# Altium PCB converter.PcbDoc (part 2 of 2)
Units mm, origin at the board's own origin, x right, y up, seen from the top; angles counter-clockwise.
Board outline 152.4 x 101.6 mm, 2 copper layers (Top Layer, Bottom Layer); 107 components, 95 nets, 363 pads, 0 vias.
Unrouted connection lines stored in the file: 249.
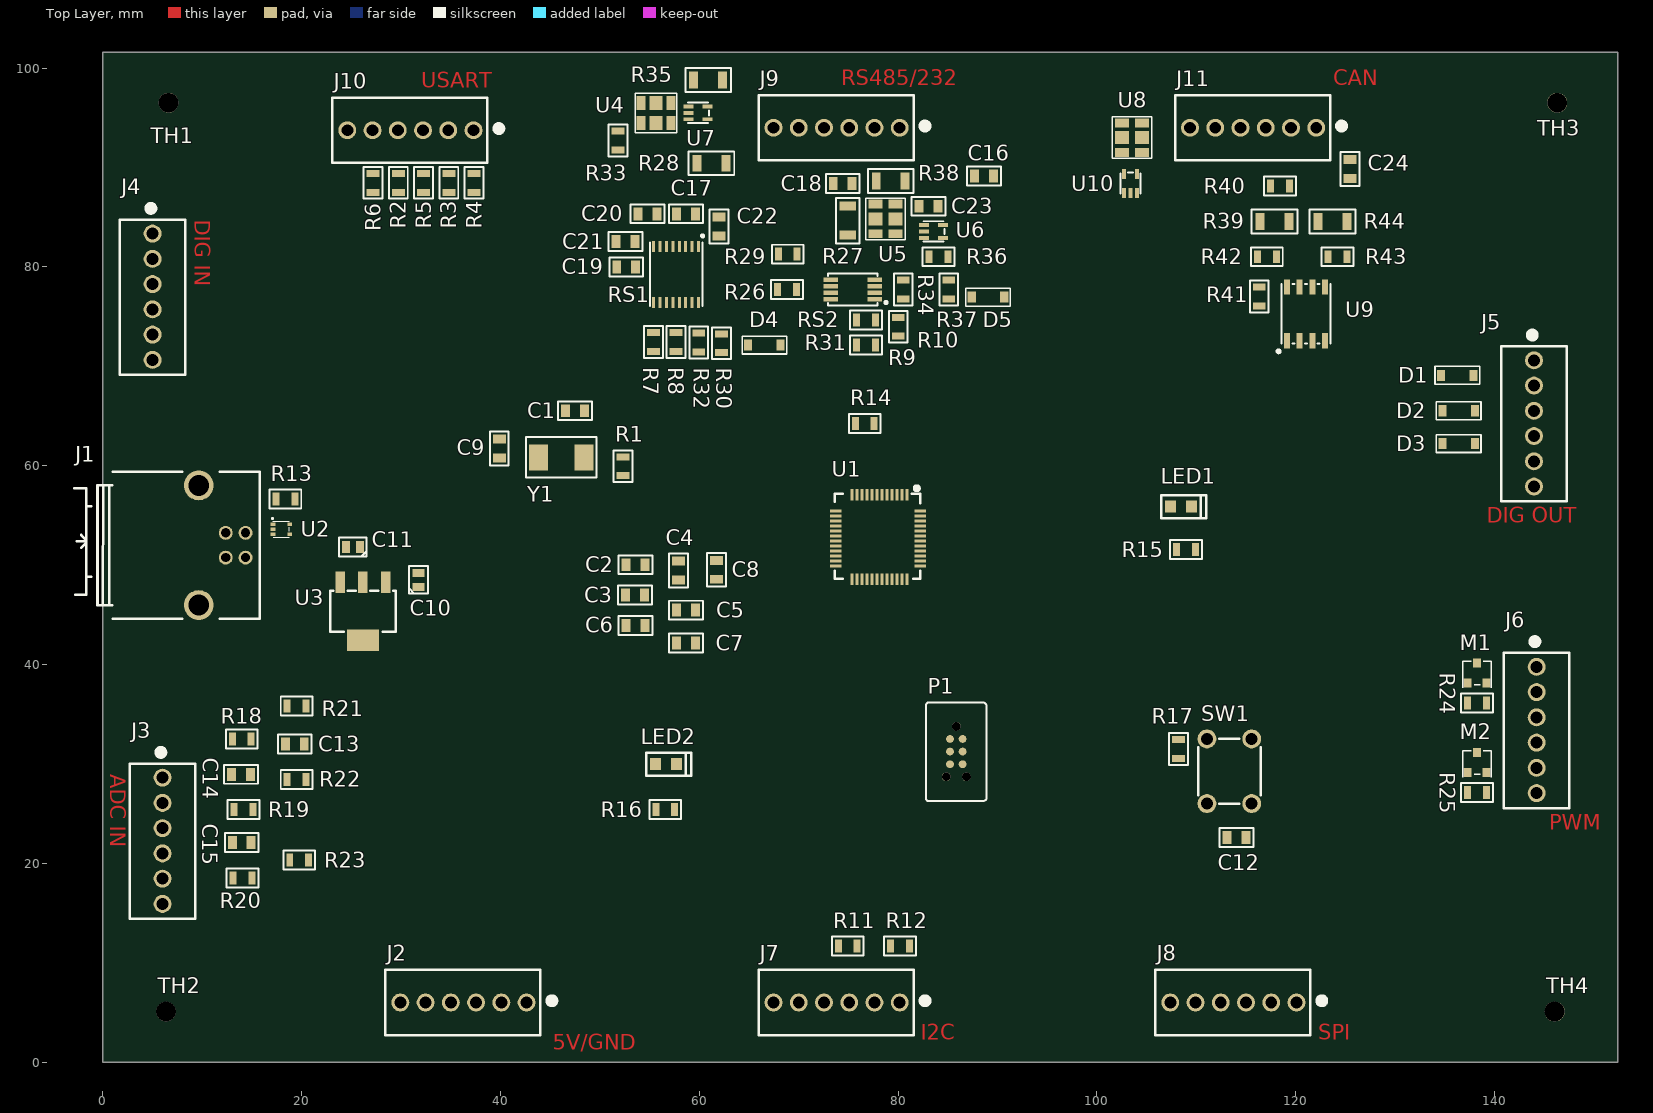
[diagram p0: Top Layer view]

## Part data (continued)
R21 R22 R23: library part RC0805FR-07100KL, "RES - 100K 1/8W 0805 1%", Case Code (Imperial)=0805, Case Code (Metric)=2012, Manufacturer=Yageo, Max Operating Temperature=155°C, Max Power Dissipation=125mW, Min Operating Temperature=-55°C, Package Quantity=1, Resistance=100kR, Resistance Tolerance=1%, Resistor Type="Thick Film", Supplier Part Number 1=311-100KCRCT-ND, Temperature Coefficient=100ppm/°C, Voltage Rating=150V, Case/Package=0805, Category="Chip SMD Resistors", ComponentLink1Description=https://datasheet.ciiva.com/11808/0900766b8106beab-11808858.pdf?src-supplier=RSComponents, ComponentLink1URL=https://datasheet.ciiva.com/11808/0900766b8106beab-11808858.pdf?src-supplier=RSComponents, ComponentLink2Description=https://datasheet.ciiva.com/7941/1686128-7941677.pdf?src-supplier=Element14, ComponentLink2URL=https://datasheet.ciiva.com/7941/1686128-7941677.pdf?src-supplier=Element14, ComponentLink3Description=https://datasheet.ciiva.com/7660/38627-7660796.pdf?src-supplier=Element14, ComponentLink3URL=https://datasheet.ciiva.com/7660/38627-7660796.pdf?src-supplier=Element14, ComponentLink4Description=https://datasheet.ciiva.com/22747/444164-22747534.pdf?src-supplier=Element14, ComponentLink4URL=https://datasheet.ciiva.com/22747/444164-22747534.pdf?src-supplier=Element14, ComponentLink5Description=https://datasheet.ciiva.com/2457/pyu-r-int-thick-7-2457018.pdf?src-supplier=Digi-Key, ComponentLink5URL=https://datasheet.ciiva.com/2457/pyu-r-int-thick-7-2457018.pdf?src-supplier=Digi-Key, ComponentLink6Description=https://datasheet.ciiva.com/2457/pyu-r-int-thick-7-2457019.pdf?src-supplier=Digi-Key, ComponentLink6URL=https://datasheet.ciiva.com/2457/pyu-r-int-thick-7-2457019.pdf?src-supplier=Digi-Key, ComponentLink7Description=https://datasheet.ciiva.com/2457/pyu-r-int-thick-7-2457017.pdf?src-supplier=Digi-Key, ComponentLink7URL=https://datasheet.ciiva.com/2457/pyu-r-int-thick-7-2457017.pdf?src-supplier=Digi-Key, ComponentLink8Description=https://datasheet.ciiva.com/12667/rc0805-12667001.pdf?src-supplier=Mouser, ComponentLink8URL=https://datasheet.ciiva.com/12667/rc0805-12667001.pdf?src-supplier=Mouser, ComponentLink9Description=https://datasheet.ciiva.com/7941/1697719-7941676.pdf?src-supplier=Element14, ComponentLink9URL=https://datasheet.ciiva.com/7941/1697719-7941676.pdf?src-supplier=Element14, ComponentLink10Description=https://datasheet.ciiva.com/7941/1697719-7941678.pdf?src-supplier=Element14, ComponentLink10URL=https://datasheet.ciiva.com/7941/1697719-7941678.pdf?src-supplier=Element14, ComponentLink11Description=https://datasheet.ciiva.com/16747/rc0805-16747226.pdf?src-supplier=Future+Electronics, ComponentLink11URL=https://datasheet.ciiva.com/16747/rc0805-16747226.pdf?src-supplier=Future+Electronics, Construction=Rectangular, Depth=1.25mm, Features="Moisture Resistant", Height=0.024inch, Lead Free="Lead Free", Lead Pitch=0.4mm, Length=2mm, Manufacturer Part Number=RC0805FR-07100KL, Military Standard=Not, Number of Pins=2, Number of Terminations=2, Packaging="Tape and Reel", Power Rating=125mW, Pricing 1="1=0,10000, 10=0,04200, 100=0,01690, 1000=0,00759, 2500=0,00659 (USD)", REACH SVHC=Unknown, RoHS=Yes, RoHS Compliant=Yes, Series=RC, Size Code=0805, Stock 1=650822, Supplier 1=Digi-Key, Technology="THICK FILM", Termination=SMD/SMT, Tolerance=1%, Voltage Rating (DC)=150V, Width=0.049inch
R27 R28 R35 R38 R39 R44: library part RC1206JR-070RL, "RES - 0R 1/4W 1206 5%", Case Code (Imperial)=1206, Case Code (Metric)=3216, Manufacturer=Yageo, Max Operating Temperature=155°C, Max Power Dissipation=250mW, Min Operating Temperature=-55°C, Package Quantity=5000, Resistance=0mR, Resistance Tolerance=5%, Resistor Type="Thick Film,Carbon Film", Supplier Part Number 1=311-0.0ERCT-ND, Temperature Coefficient=200ppm/°C, Voltage Rating=200V, Case/Package=1206, Category="Chip SMD Resistors", ComponentLink1Description=https://datasheet.ciiva.com/11808/0900766b80c6630a-11808156.pdf?src-supplier=RSComponents, ComponentLink1URL=https://datasheet.ciiva.com/11808/0900766b80c6630a-11808156.pdf?src-supplier=RSComponents, ComponentLink2Description=https://datasheet.ciiva.com/29181/402222-da-01-en-smd-widerstand-0-ohm-1206-29181568.pdf?src-supplier=Conrad, ComponentLink2URL=https://datasheet.ciiva.com/29181/402222-da-01-en-smd-widerstand-0-ohm-1206-29181568.pdf?src-supplier=Conrad, ComponentLink3Description=https://datasheet.ciiva.com/2458/pyu-rc1206-51-rohs-l-4-2458668.pdf?src-supplier=Digi-Key, ComponentLink3URL=https://datasheet.ciiva.com/2458/pyu-rc1206-51-rohs-l-4-2458668.pdf?src-supplier=Digi-Key, ComponentLink4Description=https://datasheet.ciiva.com/2458/pyu-rc1206-51-rohs-l-4-2458669.pdf?src-supplier=Digi-Key, ComponentLink4URL=https://datasheet.ciiva.com/2458/pyu-rc1206-51-rohs-l-4-2458669.pdf?src-supplier=Digi-Key, ComponentLink5Description=https://datasheet.ciiva.com/2458/pyu-rc1206-51-rohs-l-4-2458670.pdf?src-supplier=Digi-Key, ComponentLink5URL=https://datasheet.ciiva.com/2458/pyu-rc1206-51-rohs-l-4-2458670.pdf?src-supplier=Digi-Key, ComponentLink6Description=https://datasheet.ciiva.com/7857/1692832-7857421.pdf?src-supplier=Element14, ComponentLink6URL=https://datasheet.ciiva.com/7857/1692832-7857421.pdf?src-supplier=Element14, ComponentLink7Description=https://datasheet.ciiva.com/17035/pyu-rc1206-51-rohs-l-4-17035512.pdf?src-supplier=Future+Electronics, ComponentLink7URL=https://datasheet.ciiva.com/17035/pyu-rc1206-51-rohs-l-4-17035512.pdf?src-supplier=Future+Electronics, ComponentLink8Description=https://datasheet.ciiva.com/46445/444357-46445719.pdf?src-supplier=Element14, ComponentLink8URL=https://datasheet.ciiva.com/46445/444357-46445719.pdf?src-supplier=Element14, ComponentLink9Description=https://datasheet.ciiva.com/7857/1692832-7857422.pdf?src-supplier=Element14, ComponentLink9URL=https://datasheet.ciiva.com/7857/1692832-7857422.pdf?src-supplier=Element14, ComponentLink10Description=https://datasheet.ciiva.com/7983/444357-7983807.pdf?src-supplier=Element14, ComponentLink10URL=https://datasheet.ciiva.com/7983/444357-7983807.pdf?src-supplier=Element14, ComponentLink11Description=https://datasheet.ciiva.com/22747/1692832-22747541.pdf?src-supplier=Element14, ComponentLink11URL=https://datasheet.ciiva.com/22747/1692832-22747541.pdf?src-supplier=Element14, Construction=Rectangular, Contact Plating=Tin,Matte, Depth=1.6mm, Height=0.026inch, Lead Free="Lead Free", Length=3.1mm, Manufacturer Part Number=RC1206JR-070RL, Military Standard=Not, Number of Terminations=2, Packaging="Tape and Reel", Power Rating=250mW, Pricing 1="1=0.10000, 10=0.05500, 25=0.04000, 50=0.03040, 100=0.02240, 250=0.01712, 500=0.01368, 1000=0.01007 (USD)", Radiation Hardening=No, REACH SVHC=Unknown, RoHS=Yes, RoHS Compliant=Yes, Series=RC1206, Size Code=1206, Stock 1=6773822, Supplier 1=Digi-Key, Technology="THICK FILM", Termination=SMD/SMT, Tolerance=5%, Width=0.063inch
R29 R32 R33 R36: library part RMCF0805JT330R, "RES - 330R 1/8W 0805 5%", Case Code (Imperial)=0805, Case Code (Metric)=2012, Manufacturer="Stackpole Electronics", Max Operating Temperature=155°C, Max Power Dissipation=125mW, Min Operating Temperature=-55°C, Resistor Type="Thick Film", Supplier Part Number 1=RMCF0805JT330RCT-ND, Temperature Coefficient=200ppm/°C, Tolerance=5%, Case/Package=0805, Category="Chip SMD Resistors", ComponentLink1Description=http://components.arrow.com/part/dataview/44988371S7054774N1174?src-supplier=Arrow+Electronics, ComponentLink1URL=http://components.arrow.com/part/dataview/44988371S7054774N1174?src-supplier=Arrow+Electronics, ComponentLink2Description=https://www.seielect.com/catalog/SEI-Packaging.pdf?src-supplier=Digi-Key, ComponentLink2URL=https://www.seielect.com/catalog/SEI-Packaging.pdf?src-supplier=Digi-Key, ComponentLink3Description=https://www.seielect.com/Catalog/SEI-RMCF_RMCP.pdf?src-supplier=Avnet, ComponentLink3URL=https://www.seielect.com/Catalog/SEI-RMCF_RMCP.pdf?src-supplier=Avnet, ComponentLink4Description=https://www.verical.com/server-webapp/html/getDatasheet?partID=360139&src-supplier=Verical, ComponentLink4URL=https://www.verical.com/server-webapp/html/getDatasheet?partID=360139&src-supplier=Verical, ComponentLink5Description=http://www.seielect.com/Catalog/SEI-RMC.pdf?src-supplier=Future+Electronics, ComponentLink5URL=http://www.seielect.com/Catalog/SEI-RMC.pdf?src-supplier=Future+Electronics, Construction=Rectangular, Contact Plating=Tin,Matte, Depth=1.25mm, Features="Automotive AEC-Q200", Height=0.026inch, Lead Free="Lead Free", Length=2mm, Manufacturer Part Number=RMCF0805JT330R, Military Standard=Not, Mount="Surface Mount", Number of Terminations=2, Packaging="Tape and Reel", Power Rating=125mW, Pricing 1="1=0,10000, 10=0,02000, 100=0,00810, 1000=0,00366, 2500=0,00318 (USD)", Radiation Hardening=No, Resistance=330R, RoHS=Yes, RoHS Compliant=Yes, Series=RMCF, Size Code=0805, Stock 1=260111, Supplier 1=Digi-Key, Width=0.049inch
R42 R43: library part AC0805FR-0733RL, "RES - 33R 1/8W 0805 1%", Case Code (Imperial)=0805, Case Code (Metric)=2012, Manufacturer=Yageo, Max Operating Temperature=155°C, Max Power Dissipation=125mW, Min Operating Temperature=-55°C, Resistor Type="Thick Film", Supplier Part Number 1=YAG5367CT-ND, Temperature Coefficient=100ppm/°C, Tolerance=1%, Voltage Rating=150V, Case/Package=0805, Category="Chip SMD Resistors", ComponentLink1Description=http://www.mouser.com/ds/2/447/yageodocoutput-1111992.pdf?src-supplier=Mouser, ComponentLink1URL=http://www.mouser.com/ds/2/447/yageodocoutput-1111992.pdf?src-supplier=Mouser, ComponentLink2Description=http://www.yageo.com/NewPortal/yageodocoutput?fileName=/pdf/R-Chip/PYu-AC_51_RoHS_L_6.pdf&src-supplier=Digi-Key, ComponentLink2URL=http://www.yageo.com/NewPortal/yageodocoutput?fileName=/pdf/R-Chip/PYu-AC_51_RoHS_L_6.pdf&src-supplier=Digi-Key, ComponentLink3Description=http://www.yageo.com/NewPortal/yageodocoutput?fileName=/pdf/R-Chip/PYu-AC_51_RoHS_L_5.pdf&src-supplier=Digi-Key, ComponentLink3URL=http://www.yageo.com/NewPortal/yageodocoutput?fileName=/pdf/R-Chip/PYu-AC_51_RoHS_L_5.pdf&src-supplier=Digi-Key, Features="Moisture Resistant,Automotive AEC-Q200", Height=0.024inch, Length=0.079inch, Manufacturer Part Number=AC0805FR-0733RL, Number of Terminations=2, Packaging="Tape and Reel", Power Rating=125mW, Pricing 1="1=0.10000, 10=0.05000, 100=0.02040, 1000=0.00917, 2500=0.00796 (USD)", Resistance=33R, RoHS=Yes, RoHS Compliant=Yes, Series=AC, Stock 1=4670, Supplier 1=Digi-Key, Termination=SMD/SMT, Width=0.049inch
RS1: "RS-232 TRANSCEIVER 16-Pin TSSOP", Manufacturer=Renesas, Supplier Part Number 1=ICL3221EIVZ-TCT-ND, Category="RS-232 / RS-422 / RS-485 Interface ICs", ComponentLink1Description=https://4donline.ihs.com/images/VipMasterIC/IC/RNCC/RNCC-S-A0008369024/RNCC-S-A0008369024-1.pdf?hkey=6D3A4C79FDBF58556ACFDE234799DDF0&src-supplier=Farnell, ComponentLink1URL=https://4donline.ihs.com/images/VipMasterIC/IC/RNCC/RNCC-S-A0008369024/RNCC-S-A0008369024-1.pdf?hkey=6D3A4C79FDBF58556ACFDE234799DDF0&src-supplier=Farnell, ComponentLink2Description=https://4donline.ihs.com/images/VipMasterIC/IC/RNCC/RNCC-S-A0008369024/RNCC-S-A0008369024-1.pdf?hkey=6D3A4C79FDBF58556ACFDE234799DDF0&src-supplier=Newark, ComponentLink2URL=https://4donline.ihs.com/images/VipMasterIC/IC/RNCC/RNCC-S-A0008369024/RNCC-S-A0008369024-1.pdf?hkey=6D3A4C79FDBF58556ACFDE234799DDF0&src-supplier=Newark, Manufacturer Part Number=ICL3221EIVZ-T, Pricing 1="1=1,56000, 10=1,40400, 25=1,32480, 100=1,12890, 250=1,06000, 500=0,92750, 1000=0,83500 (USD)", RoHS=Yes, RoHS Compliant=Yes, Stock 1=4298, Supplier 1=Digi-Key
RS2: "RS-485 TRANSCEIVER HVD7X", Case/Package=VSSOP, Manufacturer="Texas Instruments", Max Operating Temperature=125°C, Max Supply Voltage=3.6V, Min Operating Temperature=-40°C, Min Supply Voltage=3V, Nominal Supply Current=950uA, Operating Supply Voltage=3.3V, Output Current=8mA, Output Voltage=2V, Package Quantity=2500, Supplier Part Number 1=296-SN65HVD72DGKRCT-ND, Category="Interface ICs", ComponentLink1Description=https://datasheet.ciiva.com/28650/1787953-28650706.pdf?src-supplier=Element14, ComponentLink1URL=https://datasheet.ciiva.com/28650/1787953-28650706.pdf?src-supplier=Element14, ComponentLink2Description=https://datasheet.ciiva.com/26946/getdatasheetpartid-716725-26946073.pdf?src-supplier=Verical, ComponentLink2URL=https://datasheet.ciiva.com/26946/getdatasheetpartid-716725-26946073.pdf?src-supplier=Verical, ComponentLink3Description=https://datasheet.ciiva.com/41461/001187608-da-01-en-ic-txrx-rs485-sn65hvd72dgkr-vssop-8-tid-41461063.pdf?src-supplier=Conrad, ComponentLink3URL=https://datasheet.ciiva.com/41461/001187608-da-01-en-ic-txrx-rs485-sn65hvd72dgkr-vssop-8-tid-41461063.pdf?src-supplier=Conrad, ComponentLink4Description=https://datasheet.ciiva.com/6636/sn65hvd72-6636345.pdf?src-supplier=Digi-Key, ComponentLink4URL=https://datasheet.ciiva.com/6636/sn65hvd72-6636345.pdf?src-supplier=Digi-Key, ComponentLink5Description=https://datasheet.ciiva.com/6636/sn65hvd72-6636346.pdf?src-supplier=Digi-Key, ComponentLink5URL=https://datasheet.ciiva.com/6636/sn65hvd72-6636346.pdf?src-supplier=Digi-Key, ComponentLink6Description=https://datasheet.ciiva.com/6636/sn65hvd72-6636347.pdf?src-supplier=Digi-Key, ComponentLink6URL=https://datasheet.ciiva.com/6636/sn65hvd72-6636347.pdf?src-supplier=Digi-Key, ComponentLink7Description=https://datasheet.ciiva.com/14195/sn65hvd75-14195211.pdf?src-supplier=Avnet, ComponentLink7URL=https://datasheet.ciiva.com/14195/sn65hvd75-14195211.pdf?src-supplier=Avnet, ComponentLink8Description=https://datasheet.ciiva.com/24096/sn65hvd72-446416-24096821.pdf?src-supplier=Mouser, ComponentLink8URL=https://datasheet.ciiva.com/24096/sn65hvd72-446416-24096821.pdf?src-supplier=Mouser, Data Rate=0.25Mbps, Interface=RS-485, Lead Free="Lead Free", Logic Function=Transceiver, Manufacturer Part Number=SN65HVD72DGKR, Number of Drivers=1, Number of Pins=8, Number of Receivers=1, Number of Transceivers=1, Number of Transmitters=1, Packaging="Tape and Reel", Pricing 1="1=4,03000 (USD)", Propagation Delay=0.7us, Radiation Hardening=No, REACH SVHC="No SVHC", RoHS=Yes, Series=-, Simplex/Duplex="Half Duplex", Supplier 1=Digi-Key, Supply Current=950uA
SW1: "SWITCH TACTILE 0.05A 12V", Case/Package=SMD/SMT, Color=Black, Current Rating=50mA, Manufacturer="ITT C&K", Max Operating Temperature=60°C, Max Voltage Rating (DC)=12V, Min Operating Temperature=-20°C, Operating Force=200gf, Package Quantity=1000, Supplier Part Number 1=CKN9085CT-ND, Actuator Material=Nylon,Polyamide,PA66, Actuator Type=Standard, Category="Tactile Switches", ComponentLink1Description=https://datasheet.ciiva.com/29903/getdatasheetpartid-773702-29903807.pdf?src-supplier=Verical, ComponentLink1URL=https://datasheet.ciiva.com/29903/getdatasheetpartid-773702-29903807.pdf?src-supplier=Verical, ComponentLink2Description=https://datasheet.ciiva.com/14920/pts645-14920741.pdf?src-supplier=Digi-Key, ComponentLink2URL=https://datasheet.ciiva.com/14920/pts645-14920741.pdf?src-supplier=Digi-Key, ComponentLink3Description=https://datasheet.ciiva.com/22637/1707731-22637356.pdf?src-supplier=Element14, ComponentLink3URL=https://datasheet.ciiva.com/22637/1707731-22637356.pdf?src-supplier=Element14, Contact Material=Bronze, Contact Plating=Silver, Depth=9mm, Illumination Type=Non-Illuminated,Illuminated, Lead Free="Lead Free", Length=6mm, Manufacturer Part Number=PTS645SH50SMTR92LFS, Max Current Rating=50mA, Mechanical Life=100000Cycles, Mount="Surface Mount", Orientation=Straight, Packaging="Tape and Reel", Pricing 1="1=0,25000, 10=0,24200, 25=0,22960, 100=0,20780, 250=0,18944, 500=0,17610 (USD)", REACH SVHC="No SVHC", RoHS=Yes, Series=PTS645, Stock 1=211938, Supplier 1=Digi-Key, Switch Function=Off-Mom, Termination="Gull Wing", Throw Configuration=SPST, Voltage Rating (DC)=12V
TH1 TH2 TH3 TH4: "MECH - Tooling Holes"
U1: "MCU 32-bit 128KB 2.5V/3.3V 48-Pin LQFP", Case/Package=LQFP, Frequency=72MHz, Manufacturer=STMicroelectronics, Max Operating Temperature=85°C, Max Power Dissipation=363mW, Max Supply Voltage=3.6V, Min Operating Temperature=-40°C, Min Supply Voltage=2V, Package Quantity=250, Supplier Part Number 1=497-6288-ND, Address Bus Width=32b, Category=Microcontrollers, ComponentLink1Description=https://datasheet.ciiva.com/15122/getdatasheetpartid-92132-15122195.pdf?src-supplier=Verical, ComponentLink1URL=https://datasheet.ciiva.com/15122/getdatasheetpartid-92132-15122195.pdf?src-supplier=Verical, ComponentLink2Description=https://datasheet.ciiva.com/23669/1714663-23669200.pdf?src-supplier=Newark, ComponentLink2URL=https://datasheet.ciiva.com/23669/1714663-23669200.pdf?src-supplier=Newark, ComponentLink3Description=https://datasheet.ciiva.com/26820/stm32f103cbt6-26820680.pdf?src-supplier=IIIC, ComponentLink3URL=https://datasheet.ciiva.com/26820/stm32f103cbt6-26820680.pdf?src-supplier=IIIC, ComponentLink4Description=https://datasheet.ciiva.com/5752/cd00161566-5752838.pdf?src-supplier=Farnell, ComponentLink4URL=https://datasheet.ciiva.com/5752/cd00161566-5752838.pdf?src-supplier=Farnell, ComponentLink5Description=https://datasheet.ciiva.com/1502/cd00161566-1502328.pdf?src-supplier=Digi-Key, ComponentLink5URL=https://datasheet.ciiva.com/1502/cd00161566-1502328.pdf?src-supplier=Digi-Key, ComponentLink6Description=https://datasheet.ciiva.com/4840/cd00161566-4840398.pdf?src-supplier=Mouser, ComponentLink6URL=https://datasheet.ciiva.com/4840/cd00161566-4840398.pdf?src-supplier=Mouser, ComponentLink7Description=https://datasheet.ciiva.com/16540/cd00161566-16540806.pdf?src-supplier=Avnet+Asia, ComponentLink7URL=https://datasheet.ciiva.com/16540/cd00161566-16540806.pdf?src-supplier=Avnet+Asia, ComponentLink8Description=https://datasheet.ciiva.com/16219/cd00161566-16219150.pdf?src-supplier=Future+Electronics, ComponentLink8URL=https://datasheet.ciiva.com/16219/cd00161566-16219150.pdf?src-supplier=Future+Electronics, ComponentLink9Description=https://datasheet.ciiva.com/14100/pustm-arm-microcont-stm32f103-en-14100509.pdf?src-supplier=Distrelec, ComponentLink9URL=https://datasheet.ciiva.com/14100/pustm-arm-microcont-stm32f103-en-14100509.pdf?src-supplier=Distrelec, Contact Plating=Gold, Core Architecture=ARM, Data Bus Width=32b, Density=128KB, Height=1.45mm, Interface=I2C,SPI,USB,CAN,IrDA,UART,USART,LIN, Lead Free="Lead Free", Length=7mm, Manufacturer Part Number=STM32F103CBT6, Max Frequency=72MHz, Memory Size=128KB, Memory Type=FLASH, Number of ADC Channels=10, Number of Bits=32, Number of I2C Channels=2, Number of I/Os=37, Number of Pins=48, Number of Programmable I/O=37, Number of PWM Channels=12, Number of SPI Channels=2, Number of Timers/Counters=4, Oscillator Type=Internal, Packaging=Tray, Peripherals="POR,PWM,WDT,DMA,Temp Sensor,I2C", Pricing 1="1=6.82000, 10=6.12800, 25=5.79320, 80=5.02100, 250=4.76344, 500=4.27424, 1000=3.75498 (USD)", Radiation Hardening=No, RAM Size=20KB, REACH SVHC="No SVHC", RoHS=Yes, RoHS Compliant=Yes, Series="STM32 F1", Supplier 1=Digi-Key, Termination=SMD/SMT, Watchdog Timer=Yes, Width=7.2mm
U2: "ESD TVS VRWM - 5V / VBR - 6-8V /", Breakdown Voltage=7V, Capacitance=20pF, Case/Package=SOT-553, Clamping Voltage=14V, Leakage Current=100nA, Manufacturer=Diodes, Max Operating Temperature=150°C, Max Power Dissipation=380mW, Max Surge Current=6A, Min Breakdown Voltage=6V, Min Operating Temperature=-65°C, Package Quantity=3000, Peak Pulse Power=84W, Power Line Protection=No, Resistor Type=Zener, Reverse Standoff Voltage=5V, Supplier Part Number 1=D5V0L4B5V-7DICT-ND, Test Current=1mA, Category="TVS Diodes", ComponentLink1Description=https://datasheet.ciiva.com/12326/d5v0l4b5v-218334-12326570.pdf?src-supplier=Mouser, ComponentLink1URL=https://datasheet.ciiva.com/12326/d5v0l4b5v-218334-12326570.pdf?src-supplier=Mouser, ComponentLink2Description=https://datasheet.ciiva.com/334/d5v0l4b5v-334001.pdf?src-supplier=Digi-Key, ComponentLink2URL=https://datasheet.ciiva.com/334/d5v0l4b5v-334001.pdf?src-supplier=Digi-Key, ComponentLink3Description=https://datasheet.ciiva.com/25624/0900766b8115c347-25624818.pdf?src-supplier=RSComponents, ComponentLink3URL=https://datasheet.ciiva.com/25624/0900766b8115c347-25624818.pdf?src-supplier=RSComponents, ComponentLink4Description=https://datasheet.ciiva.com/11193/d5v0l4b5v-11193845.pdf?src-supplier=Avnet, ComponentLink4URL=https://datasheet.ciiva.com/11193/d5v0l4b5v-11193845.pdf?src-supplier=Avnet, Contact Plating=Tin,Matte, Depth=1.2mm, Diode Type=ZENER, Direction=Bidirectional, ESD Protection=Yes, Height=0.6mm, Lead Free="Lead Free", Length=1.6mm, Manufacturer Part Number=D5V0L4B5V-7, Max Reverse Leakage Current=100nA, Mount="Surface Mount", Number of Bidirectional Channels=4, Number of Channels=4, Number of Pins=5, Packaging="Tape and Reel", Peak Pulse Current=6A, Polarity=Bidirectional, Pricing 1="1=0,51000, 10=0,38600, 100=0,24040, 500=0,16444, 1000=0,12650 (USD)", Radiation Hardening=No, REACH SVHC="No SVHC", RoHS=Yes, RoHS Compliant=Yes, Series=-, Stock 1=22216, Supplier 1=Digi-Key, Termination=SMD/SMT, Width=1.25mm, Working Voltage=5V
U3: "IC REG LDO 3.3V 800mA SOT223", Case/Package=SOT-223, Current Rating=800A, Dropout Voltage=1.2V, Manufacturer="Texas Instruments", Max Input Voltage=15V, Max Operating Temperature=125°C, Max Output Current=800mA, Max Supply Voltage=10V, Min Input Voltage=2.6V, Min Operating Temperature=-40°C, Min Supply Voltage=4.75V, Nominal Output Voltage=3.3V, Output Voltage Accuracy=1%, Package Quantity=1000, Quiescent Current=15mA, Supplier Part Number 1=926-LM1117IMP3.3NOPB, Accuracy=1%, Category="Voltage Regulators - Linear", ComponentLink1Description=https://datasheet.ciiva.com/27051/1281318-27051810.pdf?src-supplier=Jameco, ComponentLink1URL=https://datasheet.ciiva.com/27051/1281318-27051810.pdf?src-supplier=Jameco, ComponentLink2Description=https://datasheet.ciiva.com/8042/1670636-8042261.pdf?src-supplier=Element14, ComponentLink2URL=https://datasheet.ciiva.com/8042/1670636-8042261.pdf?src-supplier=Element14, ComponentLink3Description=https://datasheet.ciiva.com/1570/1849796-1570171.pdf?src-supplier=Farnell, ComponentLink3URL=https://datasheet.ciiva.com/1570/1849796-1570171.pdf?src-supplier=Farnell, ComponentLink4Description=https://datasheet.ciiva.com/14149/lm1117-eng-tds-14149980.pdf?src-supplier=Distrelec, ComponentLink4URL=https://datasheet.ciiva.com/14149/lm1117-eng-tds-14149980.pdf?src-supplier=Distrelec, ComponentLink5Description=https://datasheet.ciiva.com/46386/1882372-46386042.pdf?src-supplier=Element14, ComponentLink5URL=https://datasheet.ciiva.com/46386/1882372-46386042.pdf?src-supplier=Element14, ComponentLink6Description=https://datasheet.ciiva.com/3223/lm1117-n-3223515.pdf?src-supplier=Avnet, ComponentLink6URL=https://datasheet.ciiva.com/3223/lm1117-n-3223515.pdf?src-supplier=Avnet, ComponentLink7Description=https://datasheet.ciiva.com/6580/lm1117-n-6580030.pdf?src-supplier=Digi-Key, ComponentLink7URL=https://datasheet.ciiva.com/6580/lm1117-n-6580030.pdf?src-supplier=Digi-Key, ComponentLink8Description=https://datasheet.ciiva.com/6580/lm1117-n-6580026.pdf?src-supplier=Digi-Key, ComponentLink8URL=https://datasheet.ciiva.com/6580/lm1117-n-6580026.pdf?src-supplier=Digi-Key, Height=1.6mm, Lead Free="Lead Free", Length=6.5mm, Manufacturer Part Number=LM1117IMP-3.3/NOPB, Min Current Limit=800mA, Mount="Surface Mount", Number of Outputs=1, Number of Pins=4, Number of Regulators=1, Output Current=800mA, Output Type=Fixed, Output Voltage=3.3V, Packaging="Tape and Reel", Polarity=Positive, Pricing 1="1=1,28000, 10=1,15000, 50=1,09000, 100=0,89500, 1000=0,58300, 10000=0,58300 (USD)", Radiation Hardening=No, REACH SVHC="No SVHC", RoHS=Yes, RoHS Compliant=Yes, Stock 1=5, Supplier 1=Mouser, Termination=SMD/SMT, Width=3.56mm
U4 U5 U8: "TBU 240MA 40VIMP", Case/Package=DFN, Current Rating=240mA, Manufacturer=Bourns, Max Operating Temperature=85°C, Max Output Current=480mA, Min Operating Temperature=-40°C, Package Quantity=3000, Quiescent Current=700uA, Supplier Part Number 1=P40-G240-WHCT-ND, Voltage Rating=40V, Voltage Rating (DC)=28V, Approvals=UL, Category="Circuit Protection", ComponentLink1Description=https://datasheet.ciiva.com/329/p40-g-329718.pdf?src-supplier=Digi-Key, ComponentLink1URL=https://datasheet.ciiva.com/329/p40-g-329718.pdf?src-supplier=Digi-Key, ComponentLink2Description=https://datasheet.ciiva.com/4503/p40-g-69647-4503607.pdf?src-supplier=Mouser, ComponentLink2URL=https://datasheet.ciiva.com/4503/p40-g-69647-4503607.pdf?src-supplier=Mouser, ComponentLink3Description=https://datasheet.ciiva.com/1290/337271-1290116.pdf?src-supplier=Element14, ComponentLink3URL=https://datasheet.ciiva.com/1290/337271-1290116.pdf?src-supplier=Element14, ComponentLink4Description=https://datasheet.ciiva.com/329/p40-g-329719.pdf?src-supplier=Digi-Key, ComponentLink4URL=https://datasheet.ciiva.com/329/p40-g-329719.pdf?src-supplier=Digi-Key, ComponentLink5Description=https://datasheet.ciiva.com/329/p40-g-329720.pdf?src-supplier=Digi-Key, ComponentLink5URL=https://datasheet.ciiva.com/329/p40-g-329720.pdf?src-supplier=Digi-Key, ComponentLink6Description=https://datasheet.ciiva.com/3011/p40-g-3011993.pdf?src-supplier=Avnet, ComponentLink6URL=https://datasheet.ciiva.com/3011/p40-g-3011993.pdf?src-supplier=Avnet, Depth=4.1mm, Height=0.85mm, Length=4mm, Manufacturer Part Number=P40-G240-WH, Max Surge Current=240mA, Mount="Surface Mount", Number of Circuits=2, Number of Pins=6, Number of Terminals/Pins=6, Output Current=480mA, Packaging="Tape and Reel", Pricing 1="1=1.42000, 10=1.26600, 100=0.98670, 500=0.81510, 1000=0.64350 (USD)", REACH SVHC="No SVHC", Response Time=200ns, RoHS=Yes, RoHS Compliant=Yes, Series=TBU®, Stock 1=7844, Supplier 1=Digi-Key, Termination=SMD/SMT, Width=4mm, Working Voltage=28V
U6 U7 U10: "DIODE TVS ESD VRWM - 6V / VBR - 8V / VC - 16V", Breakdown Voltage=6V, Capacitance=5pF, Case/Package=SC, Clamping Voltage=11.2V, Clamping Voltage-Max=16V, Leakage Current=500nA, Manufacturer=Littelfuse, Max Operating Temperature=85°C, Max Surge Current=2A, Min Breakdown Voltage=8V, Min Operating Temperature=-40°C, Power Line Protection=No, Resistor Type=Zener, Supplier Part Number 1=F4238CT-ND, Test Current=10mA, Category="TVS Diodes", ComponentLink1Description=https://datasheet.ciiva.com/4509/littelfuse-spa-sp1002-0x-41082-4509048.pdf?src-supplier=Mouser, ComponentLink1URL=https://datasheet.ciiva.com/4509/littelfuse-spa-sp1002-0x-41082-4509048.pdf?src-supplier=Mouser, ComponentLink2Description=https://datasheet.ciiva.com/6578/littelfuse-tvs-diode-array-sp1002-datasheet-pdf-6578325.pdf?src-supplier=Digi-Key, ComponentLink2URL=https://datasheet.ciiva.com/6578/littelfuse-tvs-diode-array-sp1002-datasheet-pdf-6578325.pdf?src-supplier=Digi-Key, ComponentLink3Description=https://datasheet.ciiva.com/16488/littelfuse-spa-sp1002-0x-16488470.pdf?src-supplier=Future+Electronics, ComponentLink3URL=https://datasheet.ciiva.com/16488/littelfuse-spa-sp1002-0x-16488470.pdf?src-supplier=Future+Electronics, Diode Type=ZENER, Direction=Bidirectional, Height=1mm, Lead Free="Lead Free", Length=2.25mm, Manufacturer Part Number=SP1002-02JTG, Mount="Surface Mount", Number of Bidirectional Channels=2, Number of Channels=2, Number of Elements=1, Number of Pins=5, Packaging="Tape and Reel", Peak Pulse Current=2A, Polarity=Bidirectional, Pricing 1="1=0.44000, 10=0.37700, 100=0.28150, 500=0.22118, 1000=0.17092 (USD)", REACH SVHC=Unknown, Reverse Breakdown Voltage=6V, Reverse Standoff Voltage=6V, RoHS=Yes, RoHS Compliant=Yes, Series="SP1002, SPA®", Stock 1=29509, Supplier 1=Digi-Key, Termination=SMD/SMT, Width=1.35mm, Working Voltage=6V
U9: "CAN TRANSCEIVER - 1/1 - 3.3V", Case/Package=D, Manufacturer="Texas Instruments", Max Operating Temperature=125°C, Max Supply Current=17mA, Max Supply Voltage=3.6V, Min Operating Temperature=-40°C, Min Supply Voltage=3V, Operating Supply Voltage=3.3V, Package Quantity=1, Supplier Part Number 1=296-15380-1-ND, Category="Interface ICs", ComponentLink1Description=https://datasheet.ciiva.com/26831/sn65hvd231qdrq1-26831798.pdf?src-supplier=IIIC, ComponentLink1URL=https://datasheet.ciiva.com/26831/sn65hvd231qdrq1-26831798.pdf?src-supplier=IIIC, ComponentLink2Description=https://datasheet.ciiva.com/1766/sn65hvd230q-q1-1766618.pdf?src-supplier=Digi-Key, ComponentLink2URL=https://datasheet.ciiva.com/1766/sn65hvd230q-q1-1766618.pdf?src-supplier=Digi-Key, ComponentLink3Description=https://datasheet.ciiva.com/1766/sn65hvd230q-q1-1766619.pdf?src-supplier=Digi-Key, ComponentLink3URL=https://datasheet.ciiva.com/1766/sn65hvd230q-q1-1766619.pdf?src-supplier=Digi-Key, ComponentLink4Description=https://datasheet.ciiva.com/1766/sn65hvd230q-q1-1766620.pdf?src-supplier=Digi-Key, ComponentLink4URL=https://datasheet.ciiva.com/1766/sn65hvd230q-q1-1766620.pdf?src-supplier=Digi-Key, ComponentLink5Description=https://datasheet.ciiva.com/14424/sn65hvd232q-q1-14424394.pdf?src-supplier=Avnet, ComponentLink5URL=https://datasheet.ciiva.com/14424/sn65hvd232q-q1-14424394.pdf?src-supplier=Avnet, ComponentLink6Description=https://datasheet.ciiva.com/15150/getdatasheetpartid-373997-15150022.pdf?src-supplier=Verical, ComponentLink6URL=https://datasheet.ciiva.com/15150/getdatasheetpartid-373997-15150022.pdf?src-supplier=Verical, ComponentLink7Description=https://datasheet.ciiva.com/1598/1818609-1598776.pdf?src-supplier=Newark, ComponentLink7URL=https://datasheet.ciiva.com/1598/1818609-1598776.pdf?src-supplier=Newark, Contact Plating=Gold, Data Rate=1Mbps, Lead Free="Lead Free", Manufacturer Part Number=SN65HVD231QDRQ1, Nominal Supply Current=17mA, Number of Drivers=1, Number of Pins=8, Number of Receive Buffers=1, Number of Receivers=1, Number of Transceivers=1, Number of Transmit Buffers=1, Packaging="Tape and Reel", Pricing 1="1=3,14000, 10=2,82000, 25=2,66640, 100=2,31090, 250=2,19240, 500=1,96724, 1000=1,95650 (USD)", Radiation Hardening=No, REACH SVHC="No SVHC", RoHS=Yes, RoHS Compliant=Yes, Series=-, Stock 1=4145, Supplier 1=Digi-Key, Supply Current=17mA, Weight=0.002561oz
Y1: library part ABM7-8.000MHZ-D2Y-T, "ABM7- 8MHZ - SMD - 6mm x 3.5mm - 30 ppm - 18 pF - 20 ppm", Case/Package=CSMD, ESR (Equivalent Series Resistance)=100R, Frequency=8MHz, Frequency Stability=30ppm, Frequency Tolerance=20ppm, Load Capacitance=18pF, Manufacturer=Abracon, Max Operating Temperature=85°C, Min Operating Temperature=-40°C, Operating Frequency="8 MHz", Package Quantity=1000, Resistor Type=Ceramic, Series Resistance=80R, Supplier Part Number 1=535-9831-1-ND, Category=Crystals, ComponentLink1Description=https://datasheet.ciiva.com/15116/getdatasheetpartid-722403-15116844.pdf?src-supplier=Verical, ComponentLink1URL=https://datasheet.ciiva.com/15116/getdatasheetpartid-722403-15116844.pdf?src-supplier=Verical, ComponentLink2Description=https://datasheet.ciiva.com/1357/1718755-1357277.pdf?src-supplier=Element14, ComponentLink2URL=https://datasheet.ciiva.com/1357/1718755-1357277.pdf?src-supplier=Element14, ComponentLink3Description=https://datasheet.ciiva.com/29998/abm7-29998171.pdf?src-supplier=Avnet, ComponentLink3URL=https://datasheet.ciiva.com/29998/abm7-29998171.pdf?src-supplier=Avnet, ComponentLink4Description=https://datasheet.ciiva.com/4944/abm7-19096-4944987.pdf?src-supplier=Mouser, ComponentLink4URL=https://datasheet.ciiva.com/4944/abm7-19096-4944987.pdf?src-supplier=Mouser, ComponentLink5Description=https://datasheet.ciiva.com/16416/abm7-16416924.pdf?src-supplier=Future+Electronics, ComponentLink5URL=https://datasheet.ciiva.com/16416/abm7-16416924.pdf?src-supplier=Future+Electronics, Depth=3.5mm, Height=0.055inch, Lead Free="Lead Free", Length=6mm, Manufacturer Part Number=ABM7-8.000MHZ-D2Y-T, Mount="Surface Mount", Number of Pins=2, Packaging="Tape and Reel", Pricing 1="1=0.87000, 10=0.77300, 50=0.72240, 100=0.63840, 500=0.60480 (USD)", Radiation Hardening=No, REACH SVHC=Yes, RoHS=Yes, Series=ABM7, Stock 1=54566, Supplier 1=Digi-Key, Termination=SMD/SMT, Tolerance=20ppm, Width=0.138inch

## Nets (pads, with @x,y where several pads share a name; then routed paths per layer and width w, separated by ;. In a path a pad name is that pad's centre, name@x,y a point inside that pad or via, vN(x,y) a via of type N, cw(c..) or ccw(c..) an arc to the next point about the centre after c; other vN are vias at no path point)
+3V3: C2.1 C3.1 C4.2 C5.2 C6.1 C7.1 C8.2 C11.1 C16.2 C19.1 C24.1 D4.2 J5.1 J8.1 P1.1 R11.2 R12.2 R13.1 R15.1 R17.2 R30.2 R31.2 RS1.15 RS2.8 U1.1 U1.9 U1.24 U1.36 U1.48 U3.2 U9.3
+5V: C10.1 J1.1 J2.1 J2.2 J2.3 R16.1 U2.4 U3.1
ADC_IN_1: J3.1 R18.2
ADC_IN_2: J3.2 R19.2
ADC_IN_3: J3.3 R20.2
BOOT0: R14.2 U1.44
CAN_H: J11.6 R44.2 U8.4
CAN_L: J11.4 R39.2 R40.1 U8.3
CAN_N: R43.1 U9.6
CAN_P: R42.1 U9.7
CAN_R: J11.2 R40.2
CAN_RX: U1.45 U9.4
CAN_TVS_N: R43.2 R44.1 U8.2 U10.3
CAN_TVS_P: R39.1 R42.2 U8.1 U10.1
CAN_TX: U1.46 U9.1
GND: C1.2 C2.2 C3.2 C4.1 C5.1 C6.2 C7.2 C8.1 C9.2 C10.2 C11.2 C12.1 C13.1 C14.1 C15.1 C16.1 C18.1 C19.2 C21.2 C22.1 C23.2 C24.2 D5.1 J1.4 J1.5 J1.6 J2.4 J2.5 J2.6 J3.4 J3.5 J3.6 J4.4 J4.5 J4.6 J5.5 J5.6 J6.5 J6.6 J7.4 J7.5 J7.6 J8.6 J9.5 J9.6 J10.6 J11.1 J11.3 J11.5 LED1.1 LED2.1 P1.5 R14.1 R21.1 R22.1 R23.1 R34.1 R41.1 RS1.1 RS1.12 RS1.14 RS2.5 SW1.1 SW1.2 U1.8 U1.23 U1.35 U1.47 U2.2 U3.3 U6.4 U6.5 U7.4 U7.5 U9.2 U10.4 U10.5
I2C2_SCL: J7.2 R11.1 U1.42
I2C2_SDA: J7.1 R12.1 U1.43
I2C2_SMBAI: J7.3 U1.25
INVALID: RS1.10 U1.29
NetC1_1: C1.1 R1.2 Y1.2
NetC17_1: C17.1 RS1.4
NetC17_2: C17.2 RS1.2
NetC20_1: C20.1 RS1.6
NetC20_2: C20.2 RS1.5
NetC21_1: C21.1 RS1.7
NetC22_2: C22.2 RS1.3
NetD1_1: D1.1 J5.2
NetD2_1: D2.1 J5.3
NetD3_1: D3.1 J5.4
NetD4_1: D4.1 R26.2
NetD5_2: D5.2 R37.1
NetLED1_2: LED1.2 R15.2
NetLED2_2: LED2.2 R16.2
NetM1_1: M1.1 R24.2
NetM2_1: M2.1 R25.2
NetR2_2: R2.2 U1.10
NetR3_2: R3.2 U1.12
NetR4_2: R4.2 U1.13
NetR5_2: R5.2 U1.11
NetR6_2: R6.2 U1.14
NetR7_1: R7.1 U1.31
NetR8_1: R8.1 U1.30
NetR9_2: R9.2 U1.22
NetR10_2: R10.2 U1.21
NetR28_1: R28.1 R32.2 U4.1 U7.1
NetR30_1: R30.1 RS1.16
NetR33_2: R33.2 R35.1 U4.2 U7.3
NetR41_2: R41.2 U9.8
NRST_C: C12.2 P1.3 R17.1 SW1.3 SW1.4 U1.7
OSC_IN_C: C9.1 U1.5 Y1.1
OSC_OUT_C: R1.1 U1.6
PA5_ADC_IN: C13.2 R18.1 R21.2 U1.15
PA6_ADC_IN: C14.2 R19.1 R22.2 U1.16
PA7_ADC_IN: C15.2 R20.1 R23.2 U1.17
PB0_PWM: R24.1 U1.18
PB1_PWM: R25.1 U1.19
PB2_DIR: R34.2 RS2.2 RS2.3 U1.20
PB13_INPUT: J4.1 U1.26
PB14_INPUT: J4.2 U1.27
PB15_OUTPUT: D1.2 U1.28
PC13_OUTPUT: D2.2 U1.2
PC14_INPUT: J4.3 U1.3
PC15_OUTPUT: D3.2 U1.4
PWM_OUTPUT_1: J6.4 M2.2
PWM_OUTPUT_2: J6.2 M1.2
R1_IN: R33.1 RS1.8
RS232_RX: J9.3 R35.2 U4.4
RS232_TX: J9.4 R28.2 U4.3
RS485_N: J9.1 R27.2 U5.3
RS485_P: J9.2 R38.2 U5.4
RS485_TVS_N: C18.2 R27.1 R29.2 U5.1 U6.3
RS485_TVS_P: C23.1 R36.2 R38.1 U5.2 U6.1
SPI_MISO: J8.3 U1.40
SPI_MOSI: J8.5 U1.41
SPI_NSS: J8.4 U1.38
SPI_SCK: J8.2 U1.39
SWCLK/TCK: P1.4 U1.37
SWDIO/TMS: P1.2 U1.34
T1_OUT: R32.1 RS1.13
UART485_N: R26.1 R29.1 RS2.7
UART485_P: R36.1 R37.2 RS2.6
UART_232_RX: R7.2 RS1.9
UART_232_TX: R8.2 RS1.11
UART_485_RX: R9.1 R31.1 RS2.1
UART_485_TX: R10.1 RS2.4
USART_CK: J10.5 R6.1
USART_CTS: J10.4 R2.1
USART_RTS: J10.3 R5.1
USART_RX: J10.1 R4.1
USART_TX: J10.2 R3.1
USB_D_N: J1.2 U1.32 U2.1
USB_D_P: J1.3 R13.2 U1.33 U2.3
VCC_PWM_1: J6.3 M2.3
VCC_PWM_2: J6.1 M1.3
pads on no net: P1.6 P1.A P1.B P1.C TH1.1 TH2.1 TH3.1 TH4.1 U2.5 U4.5 U4.6 U5.5 U5.6 U6.2 U7.2 U8.5 U8.6 U9.5 U10.2

## Other copper
Top Layer:
  text "RS485/232" at 74.254,98.254 h1.52
  text "CAN" at 123.778,98.254 h1.52
  text "USART" at 32.004,98.044 h1.52
  text "DIG IN" at 9.254,84.746 h1.52 r270
  text "DIG OUT" at 139.222,54.238 h1.52
  text "ADC IN" at 0.762,28.956 h1.52 r270
  text "PWM" at 145.492,23.398 h1.52
  text "I2C" at 82.254,2.254 h1.52
  text "SPI" at 122.254,2.254 h1.52
  text "5V/GND" at 45.254,1.254 h1.52

## Silkscreen, mask and mechanical layers (free items; w line width, h text height)
Manufacturing Notes:
  drawing of 198 lines, arcs and shapes, not listed
  text "MANUFACTURING NOTES" at 60,187 h3
  text "BOARD INFO" at 110,180.084 h1.5
  text "FILES" at 61,179.476 h1.5
  text "GTO - Top Overlay" at 61,175.996 h1.5
  text "Minimum Track: 0.0762mm (3mil)" at 110,175.084 h1.5
  text "GTP - Top Paste" at 61,173.084 h1.5
  text "Minimum Clearance: 0.0762mm (3mil)" at 110,171.084 h1.5
  text "GTS - Top Solder" at 61,170.084 h1.5
  text "GTL - L1 (Positive)" at 61,167.084 h1.5
  text "Minimum Through Hole VIA: 0.6mm (23.62mil) (pad) / 0.3mm (11.8mil) (Drill)" at 110,167 h1.5
  text "G1  - L2 (Positive)" at 61,164.084 h1.5
  text "Drilling: L1-L4" at 110,163.084 h1.5
  text "G2  - L3 (Positive)" at 61,161.084 h1.5
  text "GBL - L4 (Positive)" at 61,158.084 h1.5
  text "RF TRACK ANTENNA (COPLANAR WAVEGUIDE):" at 110,156.084 h1.5
  text "GBS - Bottom Solder" at 61,155.084 h1.5
  text "GBP - Bottom Paste" at 61,152.084 h1.5
  text "Impedance Target: 50 ohm" at 110,152.084 h1.5
  text "GBO - Bottom Overlay" at 61,149 h1.5
  text "Track Width: 0.21mm (8.26mil)" at 110,148.084 h1.5
  text "GM3 - Manufacturing Notes" at 61,146 h1.5
  text "Gap: 0.15mm (5.90mil)" at 110,144.084 h1.5
  text "GM28 - Board Outline" at 61,143 h1.5
  text "Height(Reference L2): 0.11mm (4.33mil)" at 110,140.084 h1.5
  text "Dielectric Constant: 4.29" at 110,136.084 h1.5
  text "STACKUP BOARD" at 110,129 h2.5
  text "Board Layer Stack" at 111.77,124.81 h1.52
  text "Layer" at 140.21,124.81 h1.52
  text "Name" at 150.622,124.81 h1.52
  text "Material" at 174.237,124.81 h1.52
  text "Thickness" at 196.075,124.81 h1.52
  text "Constant" at 212.581,124.81 h1.52
  text "Top Overlay" at 150.622,121.762 h1.52
  text "Top Solder" at 150.622,118.714 h1.52
  text "Solder Resist" at 174.237,118.714 h1.52
  text "0,010mm" at 196.075,118.714 h1.52
  text "3.5" at 212.581,118.714 h1.52
  text "1" at 140.21,115.666 h1.52
  text "Top Layer" at 150.622,115.666 h1.52
  text "0,036mm" at 196.075,115.666 h1.52
  text "Dielectric 1" at 150.622,112.618 h1.52
  text "FR-4" at 174.237,112.618 h1.52
  text "0,320mm" at 196.075,112.618 h1.52
  text "4.8" at 212.581,112.618 h1.52
  text "2" at 140.21,109.57 h1.52
  text "Bottom Layer" at 150.622,109.57 h1.52
  text "0,036mm" at 196.075,109.57 h1.52
  text "Bottom Solder" at 150.622,106.522 h1.52
  text "Solder Resist" at 174.237,106.522 h1.52
  text "0,010mm" at 196.075,106.522 h1.52
  text "3.5" at 212.581,106.522 h1.52
  text "Bottom Overlay" at 150.622,103.474 h1.52
  text "'.TitleProject'" at 159.495,91.084 h1.5
  text "'.VersionRevision'" at 193.495,91.084 h1.5
  text "'.Company'" at 159.495,87.084 h1.5
  text "'.VariantName'" at 159.495,83.084 h1.5
Drill Drawing:
  circle w0.254: c187.756,2.481 r0.847
  lines w0.254: 186.909,5.444 188.602,5.444 188.602,7.137 186.909,7.137 186.909,5.444 ; 186.909,9.677 187.332,9.677 187.756,9.254 188.179,9.677 188.602,9.677 188.179,10.101 188.602,10.524 188.179,10.524 187.756,10.947 187.332,10.524 186.909,10.524 187.332,10.101 186.909,9.677 ; 186.909,13.064 187.756,13.487 188.602,13.064 188.179,13.911 188.602,14.757 187.756,14.334 186.909,14.757 187.332,13.911 186.909,13.064 ; 186.909,18.567 188.602,18.567 187.756,16.874 186.909,18.567
  lines w0.381: 185.39,0.491 362.685,0.491 ; 185.39,19.541 362.685,19.541 ; 199.382,-3.319 199.382,23.351 ; 213.095,-3.319 213.095,23.351 ; 241.535,-3.319 241.535,23.351 ; 254.384,-3.319 254.384,23.351 ; 273.022,-3.319 273.022,23.351 ; 311.111,-3.319 311.111,23.351 ; 326.093,-3.319 326.093,23.351 ; 345.036,-3.319 345.036,23.351 ; 185.39,-3.319 362.685,-3.319 362.685,23.351 185.39,23.351 185.39,-3.319
  text "Symbol" at 187.676,20.684 h1.83
  text "Count" at 200.525,20.684 h1.83
  text "Hole Size" at 214.238,20.684 h1.83
  text "Plated" at 242.678,20.684 h1.83
  text "Hole Type" at 255.527,20.684 h1.83
  text "Drill Layer Pair" at 274.165,20.684 h1.83
  text "Via/Pad" at 312.254,20.684 h1.83
  text "Pad Shape" at 327.236,20.684 h1.83
  text "Template" at 346.179,20.684 h1.83
  text "2" at 200.525,16.874 h1.52
  text "2,100mm (82,68mil)" at 214.238,16.874 h1.52
  text "PTH" at 242.678,16.874 h1.52
  text "Round" at 255.527,16.874 h1.52
  text "Top Layer - Bottom Layer" at 274.165,16.874 h1.52
  text "Pad" at 312.254,16.874 h1.52
  text "Rounded" at 327.236,16.874 h1.52
  text "c300h210" at 346.179,16.874 h1.52
  text "3" at 200.525,13.064 h1.52
  text "0,889mm (35,00mil)" at 214.238,13.064 h1.52
  text "NPTH" at 242.678,13.064 h1.52
  text "Round" at 255.527,13.064 h1.52
  text "Top Layer - Bottom Layer" at 274.165,13.064 h1.52
  text "Pad" at 312.254,13.064 h1.52
  text "Rounded" at 327.236,13.064 h1.52
  text "c86hn89" at 346.179,13.064 h1.52
  text "4" at 200.525,9.254 h1.52
  text "0,920mm (36,22mil)" at 214.238,9.254 h1.52
  text "PTH" at 242.678,9.254 h1.52
  text "Round" at 255.527,9.254 h1.52
  text "Top Layer - Bottom Layer" at 274.165,9.254 h1.52
  text "Pad" at 312.254,9.254 h1.52
  text "Rounded" at 327.236,9.254 h1.52
  text "c140h92" at 346.179,9.254 h1.52
  text "4" at 200.525,5.444 h1.52
  text "2,000mm (78,74mil)" at 214.238,5.444 h1.52
  text "NPTH" at 242.678,5.444 h1.52
  text "Round" at 255.527,5.444 h1.52
  text "Top Layer - Bottom Layer" at 274.165,5.444 h1.52
  text "Pad" at 312.254,5.444 h1.52
  text "Rounded" at 327.236,5.444 h1.52
  text "c200hn200" at 346.179,5.444 h1.52
  text "64" at 200.525,1.634 h1.52
  text "1,200mm (47,24mil)" at 214.238,1.634 h1.52
  text "PTH" at 242.678,1.634 h1.52
  text "Round" at 255.527,1.634 h1.52
  text "Top Layer - Bottom Layer" at 274.165,1.634 h1.52
  text "Pad" at 312.254,1.634 h1.52
  text "Rounded" at 327.236,1.634 h1.52
  text "(Mixed)" at 346.179,1.634 h1.52
  text "77 Total" at 200.525,-2.176 h1.52